# Allegro board board.brd
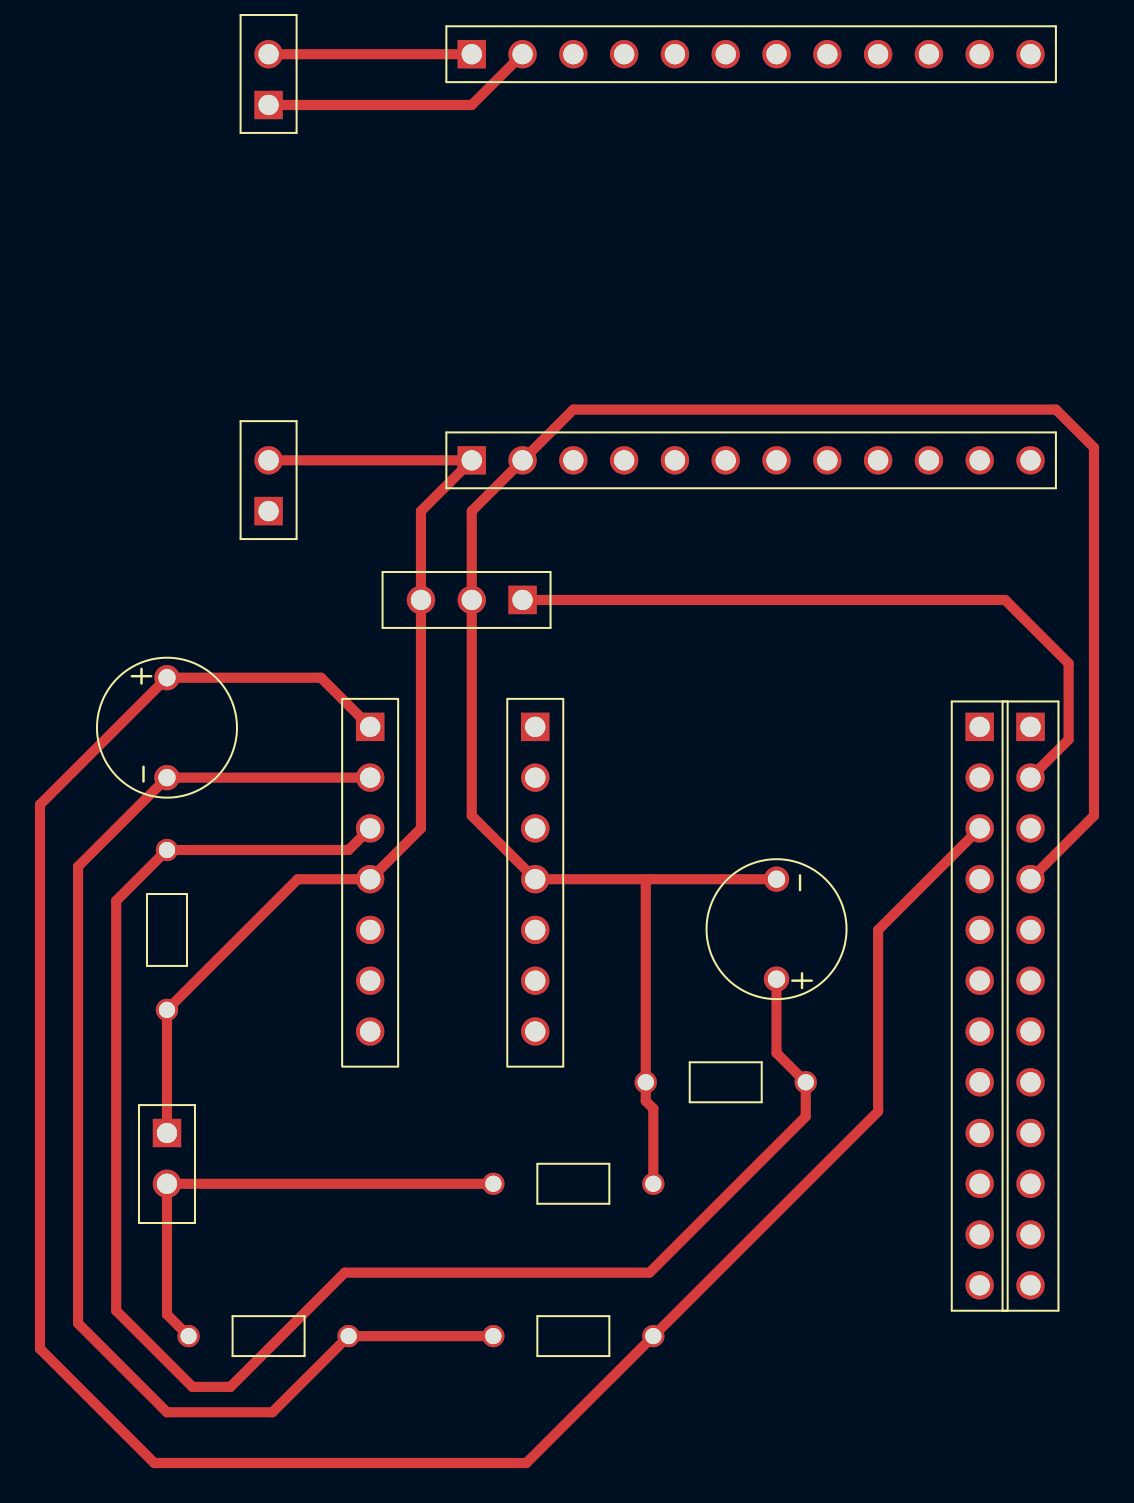
[diagram p0: board, top side]
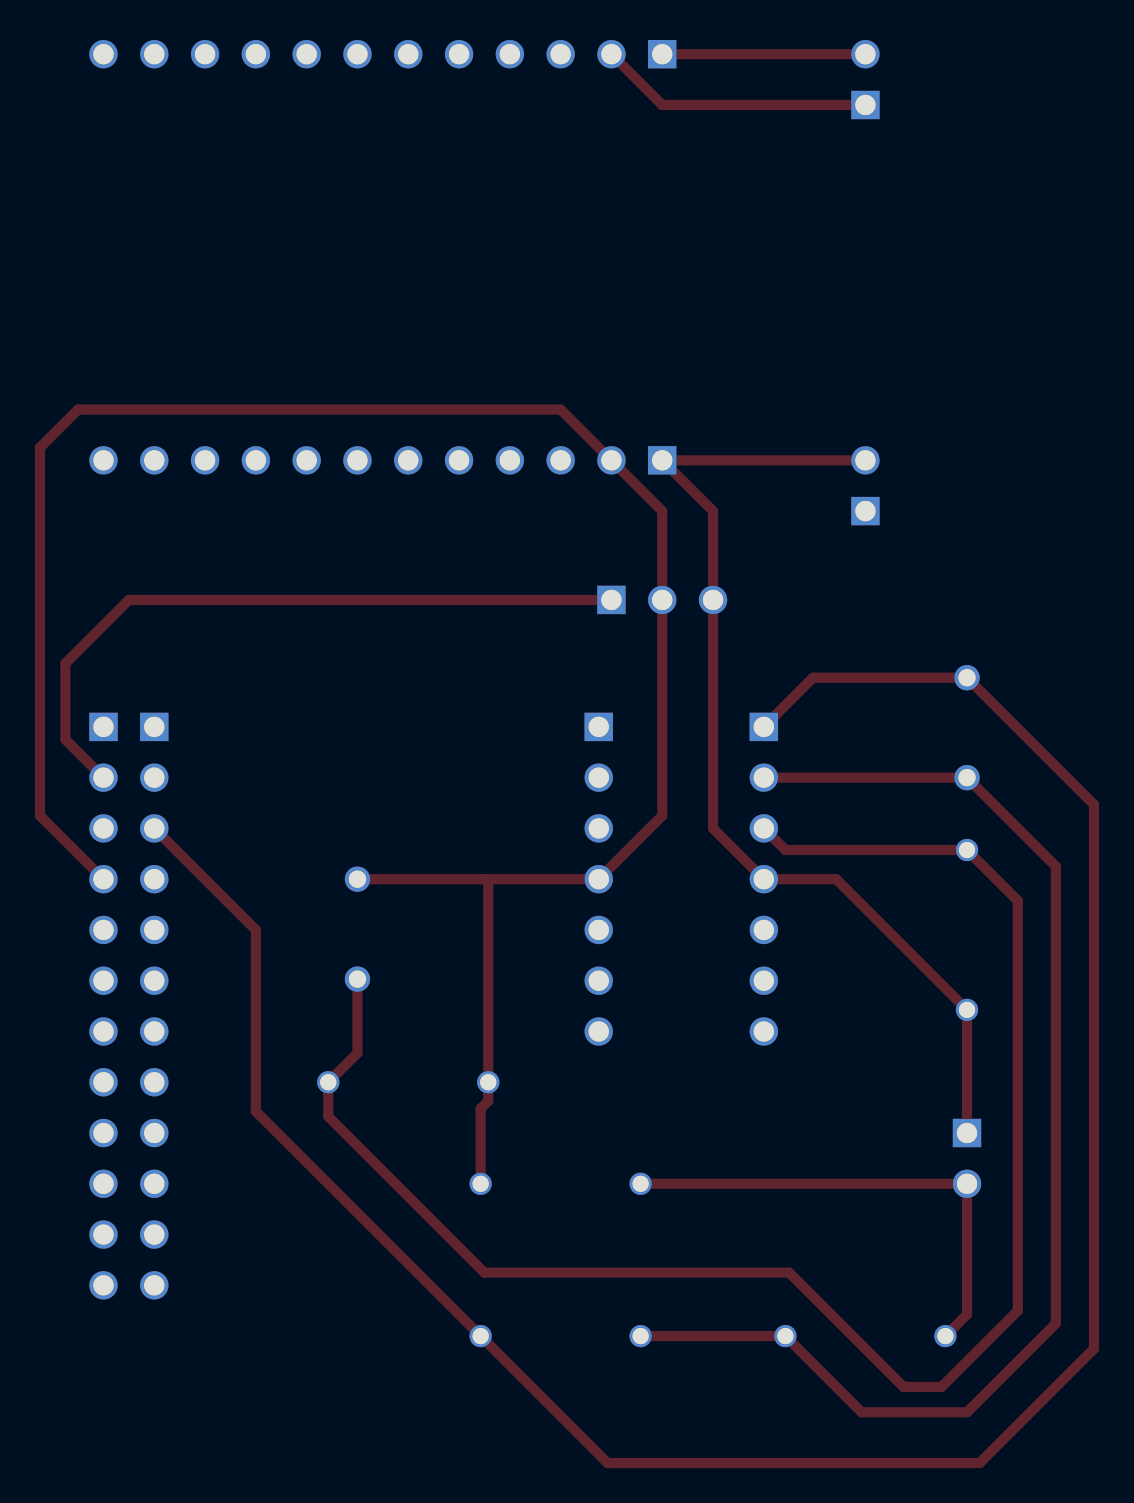
[diagram p1: board, bottom side, seen from below]

No outline. copper layers: TOP, BOTTOM. Coordinates in mm from the lowest, leftmost part position.

## Design rules (mm)
constraint set DEFAULT: min track width 0.127

## Placement (name value [footprint] x y rotation side)
0.1U_C1  1000uF  [THROUGH_CAP]  30.48 22.86 270 top
0.1U_C2  1000uF  [THROUGH_CAP]  0 27.94 90 top
J1  -  [CON12]  40.64 30.48 0 top
J2  -  [CON12]  43.18 30.48 0 top
J3  -  [CON3]  17.78 36.83 270 top
J4  -  [CON12]  15.24 64.13 90 top
J5  -  [CON12]  15.24 43.82 90 top
J6  -  [CON2]  5.08 61.6 180 top
J7  -  [CON2]  5.08 41.28 180 top
J8  -  [CON7]  10.16 30.48 0 top
J9  -  [CON7]  18.41 30.48 0 top
J10  -  [CON2]  0 10.16 0 top
UNK10K_R3  18  [THD_8MM]  0 20.32 90 top
UNK10K_R5  18  [THD_8MM]  27.94 12.7 180 top
UNK10M_R2  18  [THD_8MM]  20.32 7.62 180 top
UNK330K_R4  18  [THD_8MM]  5.08 0 0 top
UNK330K_R6  18  [THD_8MM]  20.32 0 180 top

## Library data of the parts
0.1U_C1 0.1U_C2 = C_elect
J1 J2 J4 J5 = CON12
J3 = CON3
J6 J7 J10 = CON2
J8 J9 = CON7
UNK10K_R3 UNK10K_R5 UNK10M_R2 UNK330K_R4 UNK330K_R6 = R

## Footprints (pads in the part's own frame, mm; a bottom-side part is the same pattern mirrored in y, then rotated)
CON2
  rect 1.422x1.422 hole 1.016: 1(0,0)
  round 1.422 hole 1.016: 2(0,-2.54)
CON3
  rect 1.422x1.422 hole 1.016: 1(0,0)
  round 1.422 hole 1.016: 2(0,-2.54) 3(0,-5.08)
CON7
  rect 1.422x1.422 hole 1.016: 1(0,0)
  round 1.422 hole 1.016: 2(0,-2.54) 3(0,-5.08) 4(0,-7.62) 5(0,-10.16) 6(0,-12.7) 7(0,-15.24)
CON12
  rect 1.422x1.422 hole 1.016: 1(0,0)
  round 1.422 hole 1.016: 2(0,-2.54) 3(0,-5.08) 4(0,-7.62) 5(0,-10.16) 6(0,-12.7) 7(0,-15.24) 8(0,-17.78) 9(0,-20.32) 10(0,-22.86) 11(0,-25.4) 12(0,-27.94)
THD_8MM
  round 1.118 hole 0.813: 1(-4,0) 2(4,0)
THROUGH_CAP
  round 1.27 hole 0.864: 1(0,0) 2(5,0)

## Nets
0: 0.1U_C1.1 J2.4 J3.2 J5.2 J9.4 UNK10K_R5.2 UNK10M_R2.1
RFPWR: J7.1
N00718: J4.2 J6.1
N00722: J4.1 J6.2
N01235: J3.3 J5.1 J7.2 J8.4 J10.1 UNK10K_R3.1
N01942: J10.2 UNK10M_R2.2 UNK330K_R4.1
N01997: 0.1U_C2.1 J8.2 UNK330K_R4.2 UNK330K_R6.2
N02558: 0.1U_C1.2(-) J8.3 UNK10K_R3.2 UNK10K_R5.1
N02737: 0.1U_C2.2(-) J1.3 J8.1 UNK330K_R6.1
N05029: J2.2 J3.1

Pads without a net: J1 1 2 4 5 6 7 8 9 10 11 12; J2 1 3 5 6 7 8 9 10 11 12; J4 3 4 5 6 7 8 9 10 11 12; J5 3 4 5 6 7 8 9 10 11 12; J8 5 6 7; J9 1 2 3 5 6 7

## Routing (per net, layer and track width the routed paths; a pad name or vN(x,y) marks a point on that pad's centre or on a via; arc(x,y) is an arc through that point)
0: length 104.2
  TOP w0.508: UNK10M_R2.1 24.32,11.38 23.94,11.76 UNK10K_R5.2 23.94,22.67 24.13,22.86 ; 24.13,22.86 0.1U_C1.1 ; 24.13,22.86 J9.4 15.24,26.04 J3.2 15.24,41.28 J5.2 20.32,46.36 44.45,46.36 46.35,44.45 46.35,26.04 J2.4
N00718: length 13.8
  TOP w0.508: J4.2 15.24,61.6 J6.1
N00722: length 10.2
  TOP w0.508: J6.2 J4.1
N01235: length 52.2
  TOP w0.508: J7.2 J5.1 12.7,41.28 J3.3 12.7,25.4 J8.4 6.54,22.86 UNK10K_R3.1 J10.1
N01942: length 24.4
  TOP w0.508: UNK10M_R2.2 J10.2 0,1.08 UNK330K_R4.1
N01997: length 63.5
  TOP w0.508: UNK330K_R6.2 UNK330K_R4.2 5.27,-3.81 0,-3.81 -4.45,0.64 -4.45,23.49 0.1U_C2.1 J8.2
N02558: length 83.8
  TOP w0.508: J8.3 9.08,24.32 UNK10K_R3.2 -2.54,21.78 -2.54,1.27 1.27,-2.54 3.18,-2.54 8.89,3.17 24.13,3.17 31.94,10.98 UNK10K_R5.1 30.48,14.16 0.1U_C1.2
N02737: length 115.2
  TOP w0.508: J8.1 7.7,32.94 0.1U_C2.2 -6.35,26.59 -6.35,-0.63 -0.63,-6.35 17.97,-6.35 UNK330K_R6.1 35.56,11.24 35.56,20.32 J1.3
N05029: length 35.1
  TOP w0.508: J3.1 41.91,36.83 45.09,33.66 45.09,29.85 J2.2
